# EAGLE board smd-adapter-zif (EAGLE 6.4)
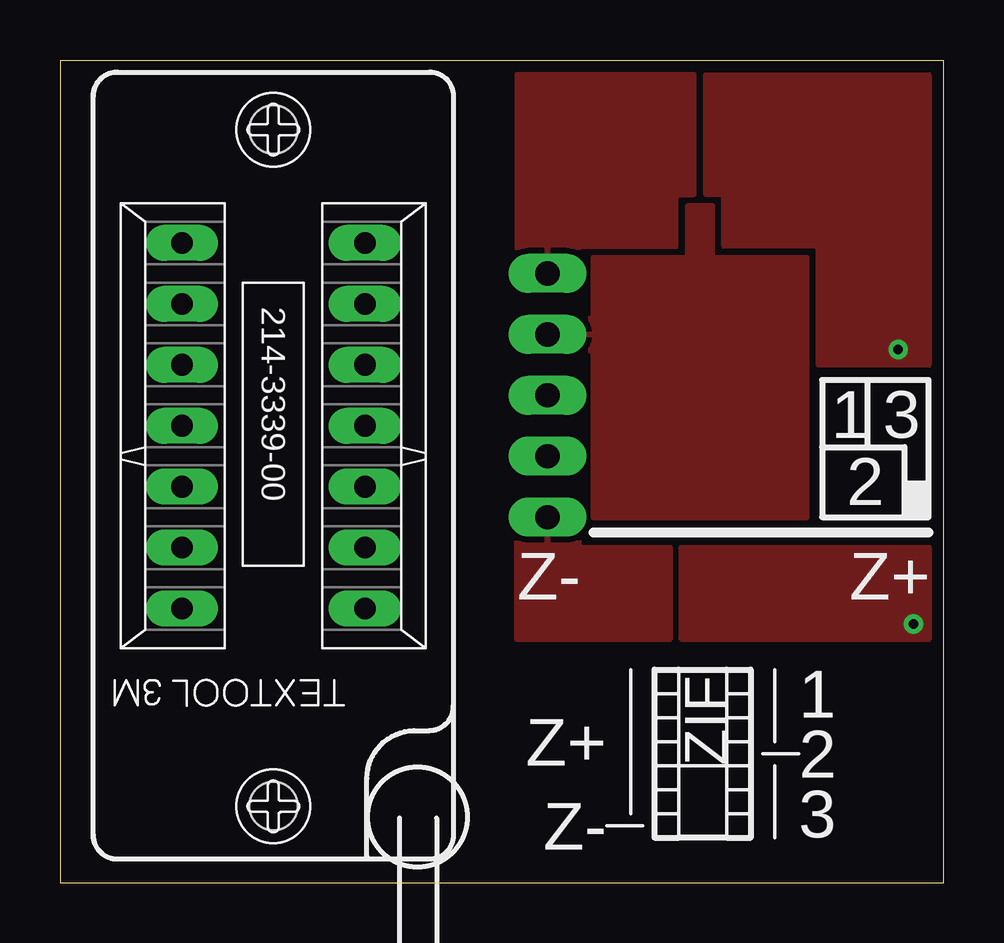
[diagram p0: board, top side]
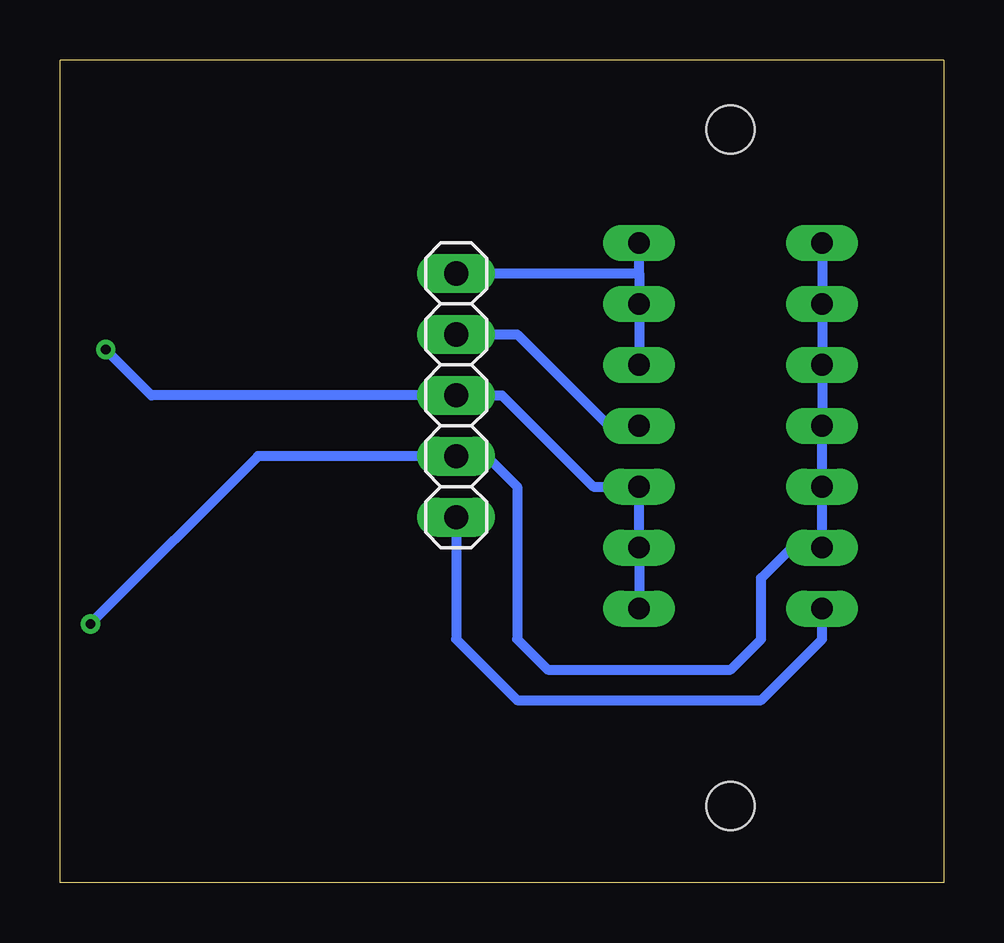
[diagram p1: board, bottom side, seen from below]

Size 36.83 x 34.29 mm. Coordinates in mm from the lower left corner, seen from the top.
Outline: 0,34.29 36.83,34.29 36.83,0 0,0 0,34.29
Copper layers (1*16): Top 0.035mm / dielectric 1.5mm / Bottom 0.035mm
Design rules "DFRobot_Eagle_Rule_v0.4": minimum track width 6mil, minimum drill 12mil, track to track 6mil, track to pad 6mil, pad to pad 6mil, via to via 6mil, smd to smd 0mil, copper to edge 10mil, drill to drill 10mil, minimum pad ring 12mil, minimum via ring 8mil, stop-mask expansion 2mil, vias tented up to drill 25mil, thermal gap 10mil
Net classes: 0 default: width 0.406 mm

## Footprints (pad centres in the part's own frame; a part is rotated, then mirrored left to right if it is on the bottom)
214-3339-00-0602J = drill 0.9 long: 1 -7.62,-3.81; 2 -5.08,-3.81; 3 -2.54,-3.81; 4 0,-3.81; 5 2.54,-3.81; 6 5.08,-3.81; 7 7.62,-3.81; 8 7.62,3.81; 9 5.08,3.81; 10 2.54,3.81; 11 0,3.81; 12 -2.54,3.81; 13 -5.08,3.81; 14 -7.62,3.81 | hole 2: 12.35,0; -15.85,0
1X05 = drill 1.016 long: 1 -5.08,0; 2 -2.54,0; 3 0,0; 4 2.54,0; 5 5.08,0

## Placement (x,y rotation side)
E$1  [214-3339-00-0602J]  8.89,19.05 90 top
JP5  TESTSMD  [1X05]  20.32,20.32 270 bottom

## Library data of the parts
E$1 = con-3m
JP5 = pinhead; REICHELT: AW 122/xx

## Nets
TEST1: E$1.5 E$1.6 E$1.7 JP5.1
TEST2: E$1.4 JP5.2
TEST3: E$1.1 E$1.2 E$1.3 JP5.3
TESTZ+: E$1.8 E$1.9 E$1.10 E$1.11 E$1.12 E$1.13 JP5.4
TESTZ-: E$1.14 JP5.5

## Tracks (layer width: path | path; a pad name or v marks a point on that pad's centre or on a via)
TEST1
  Bottom 0.406: JP5.1 12.7,25.4 | 12.7,25.4 E$1.7 | 12.7,25.4 E$1.6 E$1.5
  pour Top: 19.05,24.77 21.59,24.77 21.59,26.54 25.65,26.54 25.65,28.7 26.42,28.7 26.42,33.66 19.05,33.66
TEST2
  Bottom 0.406: JP5.2 17.78,22.86 13.97,19.05 E$1.4
  pour Top: 19.05,23.5 19.05,22.23 22.23,22.23 22.23,15.24 31.11,15.24 31.11,26.04 27.18,26.04 27.18,28.19 26.16,28.19 26.16,26.04 22.23,26.04 22.23,23.5
TEST3  (via drill 0.4)
  Bottom 0.406: v34.92,22.23 33.02,20.32 JP5.3 18.41,20.32 14.61,16.51 E$1.3 E$1.2 E$1.1
  pour Top: 31.62,26.54 27.69,26.54 27.69,28.7 26.92,28.7 26.92,33.66 36.2,33.66 36.2,21.59 31.62,21.59
TESTZ+  (via drill 0.4)
  Bottom 0.406: v35.56,10.79 28.57,17.78 JP5.4 19.05,17.78 17.78,16.51 17.78,10.16 16.51,8.89 8.89,8.89 7.62,10.16 7.62,12.7 6.35,13.97 E$1.13 E$1.12 E$1.11 E$1.10 E$1.9 E$1.8
  pour Top: 25.91,13.97 36.2,13.97 36.2,10.16 25.91,10.16
TESTZ-
  Bottom 0.406: JP5.5 20.32,10.16 17.78,7.62 7.62,7.62 5.08,10.16 E$1.14
  pour Top: 19.05,10.16 19.05,15.24 21.59,15.24 21.59,13.97 25.4,13.97 25.4,10.16

## Text on the board
tPlace: ZIF
tNames: 1 | 3 | 2 | Z- | Z+ | Z+ | 1 | 2 | Z- | 3